# EAGLE board agatbreadboard (EAGLE 7.5.0), part 1 of 5
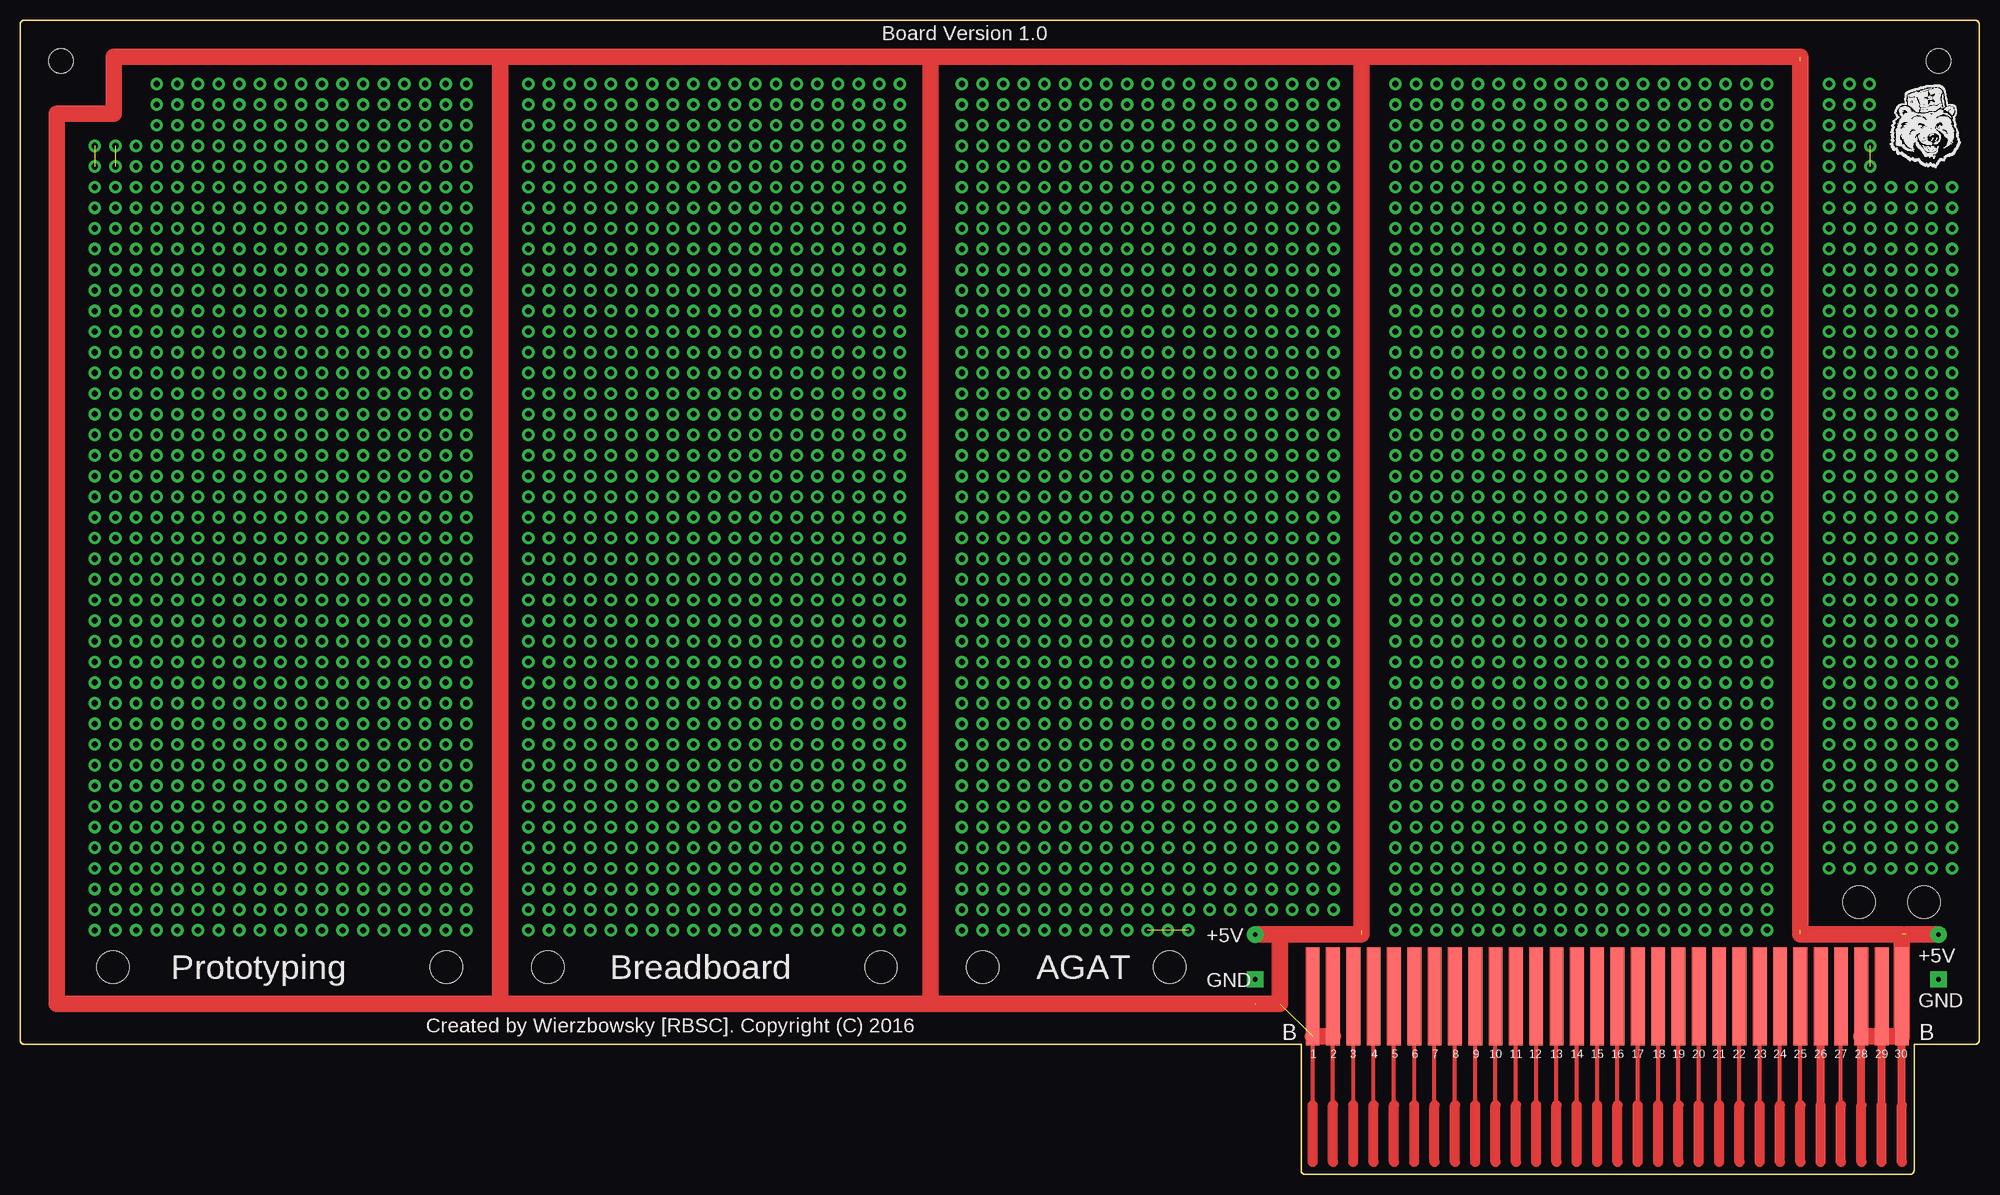
[diagram p0: board, top side]
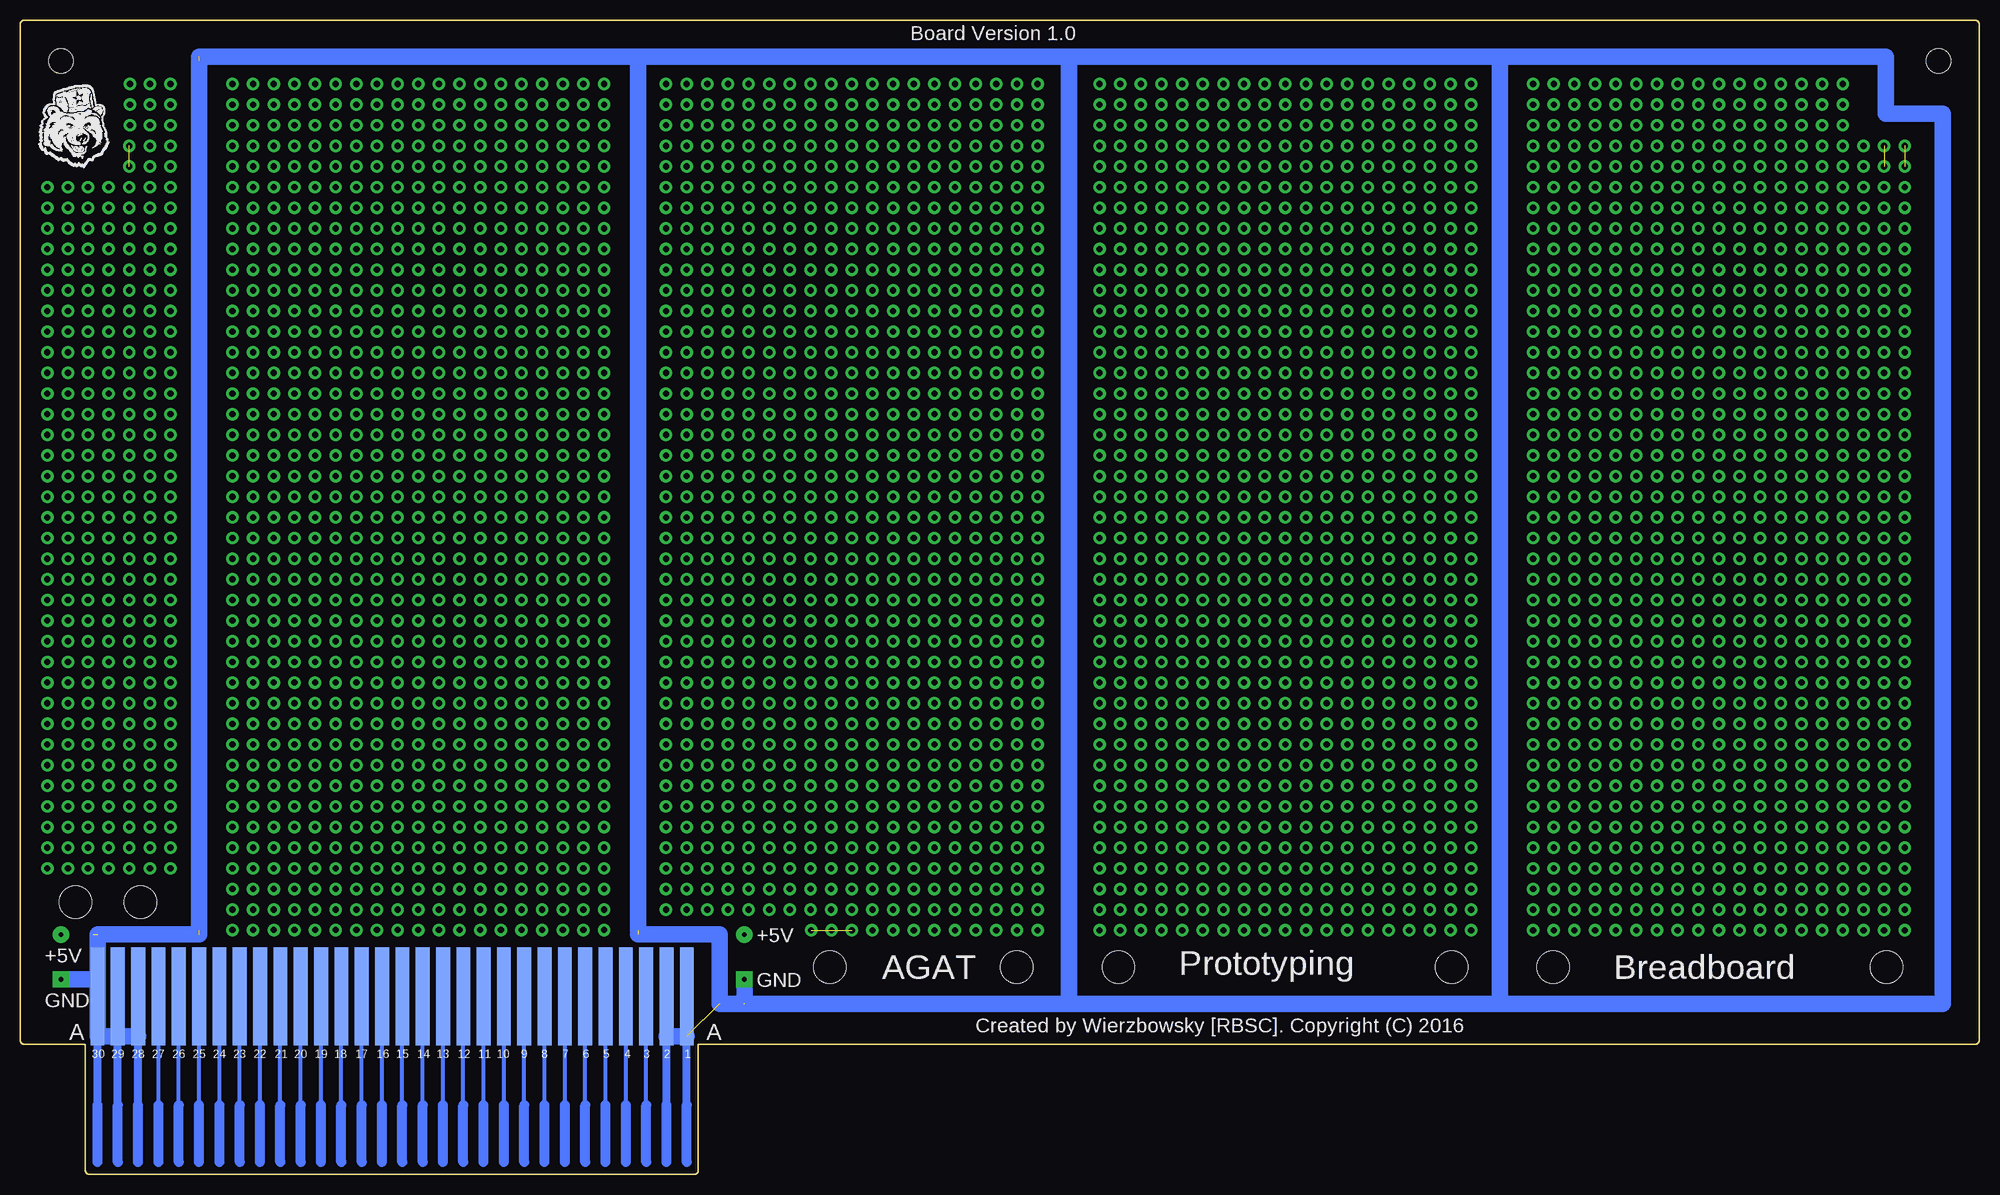
[diagram p1: board, bottom side, seen from below]

Size 241 x 142 mm. Coordinates in mm from the lower left corner, seen from the top.
Outline: 0.5,142 240.5,142 arc-90 241,141.5 241,16.5 arc-90 240.5,16 233,16 233,0.5 arc-90 232.5,0 158,0 arc-90 157.6,0.5 157.6,16 0.5,16 arc-90 0,16.5 0,141.5 arc-90 0.5,142
Copper layers (1*16): Top 0.035mm / dielectric 1.5mm / Bottom 0.035mm
Design rules "default": minimum track width 10mil, minimum drill 24mil, track to track 8mil, track to pad 8mil, pad to pad 8mil, via to via 8mil, smd to smd 8mil, copper to edge 40mil, drill to drill 8mil, minimum pad ring 10mil, minimum via ring 8mil, stop-mask expansion 4mil, vias tented up to drill 0mil, thermal gap 10mil
Holes 3 mm at 5,137 236,137
Holes 4 mm at 11.4,25.5 52.4,25.5 64.9,25.5 105.9,25.5 118.4,25.5 141.4,25.5 234.2,33.5 226.2,33.5

## Footprints (pad centres in the part's own frame; a part is rotated, then mirrored left to right if it is on the bottom)
AGAT_CONP = smd 1.7 x 12 bottom: A1 -75,21.9; A2 -72.5,21.9; A3 -70,21.9; A4 -67.5,21.9; A5 -65,21.9; A6 -62.5,21.9; A7 -60,21.9; A8 -57.5,21.9; A9 -55,21.9; A10 -52.5,21.9; A11 -50,21.9; A12 -47.5,21.9; A13 -45,21.9; A14 -42.5,21.9; A15 -40,21.9; A16 -37.5,21.9; A17 -35,21.9; A18 -32.5,21.9; A19 -30,21.9; A20 -27.5,21.9; A21 -25,21.9; A22 -22.5,21.9; A23 -20,21.9; A24 -17.5,21.9; A25 -15,21.9; A26 -12.5,21.9; A27 -10,21.9; A28 -7.5,21.9; A29 -5,21.9; A30 -2.5,21.9 | smd 1.7 x 12: B1 -75,21.9; B2 -72.5,21.9; B3 -70,21.9; B4 -67.5,21.9; B5 -65,21.9; B6 -62.5,21.9; B7 -60,21.9; B8 -57.5,21.9; B9 -55,21.9; B10 -52.5,21.9; B11 -50,21.9; B12 -47.5,21.9; B13 -45,21.9; B14 -42.5,21.9; B15 -40,21.9; B16 -37.5,21.9; B17 -35,21.9; B18 -32.5,21.9; B19 -30,21.9; B20 -27.5,21.9; B21 -25,21.9; B22 -22.5,21.9; B23 -20,21.9; B24 -17.5,21.9; B25 -15,21.9; B26 -12.5,21.9; B27 -10,21.9; B28 -7.5,21.9; B29 -5,21.9; B30 -2.5,21.9

## Placement (x,y rotation side)
EDG1  [AGAT_CONP]  234,0 0 top

## Library data of the parts
EDG1 = AGAT_Slot_Connector

## Tracks (layer width: path | path; a pad name or v marks a point on that pad's centre or on a via)
+5V  (via drill 0.6 pad 2)  (3 unrouted)
  Top 1: 4.5,106.54 4.5,106.5 | 4.5,71.54 4.5,72
  Top 2: 165,137.5 219,137.5 219,30 | 165,137.5 112,137.5 | 112,137.5 59,137.5 | 59,137.5 11.5,137.5 11.5,130.5 4.5,130.5 4.5,106.5 4.5,72 4.5,21 59,21 | 59,21 112,21 | 112,21 155,21 155,29.5 | 59,137.5 59,21 | 155,29.5 165,29.5 165,137.5 | 219,29.5 231.5,29.5 231.5,17 226.5,17 | 232,29.5 v236,29.5 | 112,137.5 112,21 | v151.92,29.5 155,29.5
  Bottom 2: 161.5,17 159,17
GND  (via drill 0.6 pad 2)  (3 unrouted)
  Bottom 2: 219,137.5 11.5,137.5 11.5,130.5 4.5,130.5 4.5,21 59,21 | 59,21 112,21 | 112,21 151.92,21 v151.92,24 | 59,137 59,21 | 152,21 155,21 155,29.5 165,29.5 | 112,137 112,21 | 165,137.5 165,30 | 219,137 219,29.5 231.5,29.5 231.5,24 | 231.5,24 231.5,17 226.5,17 | v236,24 231.5,24
HOLE1  (via drill 0.76 pad 1.52)
  other vias: 192.04,30.07
HOLE2  (via drill 0.76 pad 1.52)
  other vias: 181.88,30.07
HOLE111  (via drill 0.76 pad 1.52)
  other vias: 32.02,47.81
HOLE112  (via drill 0.76 pad 1.52)
  other vias: 21.86,47.81
HOLE113  (via drill 0.76 pad 1.52)
  other vias: 32.02,50.35
HOLE114  (via drill 0.76 pad 1.52)
  other vias: 21.86,50.35
HOLE115  (via drill 0.76 pad 1.52)
  other vias: 32.02,52.89
HOLE116  (via drill 0.76 pad 1.52)
  other vias: 21.86,52.89
HOLE117  (via drill 0.76 pad 1.52)
  other vias: 32.02,55.43
HOLE118  (via drill 0.76 pad 1.52)
  other vias: 21.86,55.43
HOLE119  (via drill 0.76 pad 1.52)
  other vias: 32.02,57.97
HOLE120  (via drill 0.76 pad 1.52)
  other vias: 21.86,57.97
HOLE121  (via drill 0.76 pad 1.52)
  other vias: 32.02,60.51
HOLE122  (via drill 0.76 pad 1.52)
  other vias: 21.86,60.51
HOLE123  (via drill 0.76 pad 1.52)
  other vias: 32.02,63.05
HOLE124  (via drill 0.76 pad 1.52)
  other vias: 21.86,63.05
HOLE125  (via drill 0.76 pad 1.52)
  other vias: 32.02,65.59
HOLE126  (via drill 0.76 pad 1.52)
  other vias: 21.86,65.59
HOLE127  (via drill 0.76 pad 1.52)
  other vias: 32.02,68.13
HOLE128  (via drill 0.76 pad 1.52)
  other vias: 21.86,68.13
HOLE129  (via drill 0.76 pad 1.52)
  other vias: 32.02,70.67
HOLE130  (via drill 0.76 pad 1.52)
  other vias: 21.86,70.67
HOLE131  (via drill 0.76 pad 1.52)
  other vias: 32.02,73.21
HOLE132  (via drill 0.76 pad 1.52)
  other vias: 21.86,73.21
HOLE133  (via drill 0.76 pad 1.52)
  other vias: 32.02,75.75
HOLE134  (via drill 0.76 pad 1.52)
  other vias: 21.86,75.75
HOLE135  (via drill 0.76 pad 1.52)
  other vias: 32.02,78.29
HOLE136  (via drill 0.76 pad 1.52)
  other vias: 21.86,78.29
HOLE137  (via drill 0.76 pad 1.52)
  other vias: 32.02,80.83
HOLE138  (via drill 0.76 pad 1.52)
  other vias: 21.86,80.83
HOLE139  (via drill 0.76 pad 1.52)
  other vias: 32.02,83.37
HOLE140  (via drill 0.76 pad 1.52)
  other vias: 21.86,83.37
HOLE141  (via drill 0.76 pad 1.52)
  other vias: 32.02,85.91
HOLE142  (via drill 0.76 pad 1.52)
  other vias: 21.86,85.91
HOLE143  (via drill 0.76 pad 1.52)
  other vias: 32.02,88.45
HOLE144  (via drill 0.76 pad 1.52)
  other vias: 21.86,88.45
HOLE145  (via drill 0.76 pad 1.52)
  other vias: 32.02,90.99
HOLE146  (via drill 0.76 pad 1.52)
  other vias: 21.86,90.99
HOLE147  (via drill 0.76 pad 1.52)
  other vias: 32.02,93.53
HOLE148  (via drill 0.76 pad 1.52)
  other vias: 21.86,93.53
HOLE149  (via drill 0.76 pad 1.52)
  other vias: 32.02,96.07
HOLE150  (via drill 0.76 pad 1.52)
  other vias: 21.86,96.07
HOLE151  (via drill 0.76 pad 1.52)
  other vias: 32.02,98.61
HOLE152  (via drill 0.76 pad 1.52)
  other vias: 21.86,98.61
HOLE153  (via drill 0.76 pad 1.52)
  other vias: 32.02,101.15
HOLE154  (via drill 0.76 pad 1.52)
  other vias: 21.86,101.15
HOLE155  (via drill 0.76 pad 1.52)
  other vias: 32.02,103.69
HOLE156  (via drill 0.76 pad 1.52)
  other vias: 21.86,103.69
HOLE157  (via drill 0.76 pad 1.52)
  other vias: 32.02,106.23
HOLE158  (via drill 0.76 pad 1.52)
  other vias: 21.86,106.23
HOLE159  (via drill 0.76 pad 1.52)
  other vias: 32.02,108.77
HOLE160  (via drill 0.76 pad 1.52)
  other vias: 21.86,108.77
HOLE161  (via drill 0.76 pad 1.52)
  other vias: 32.02,111.31
HOLE162  (via drill 0.76 pad 1.52)
  other vias: 21.86,111.31
HOLE163  (via drill 0.76 pad 1.52)
  other vias: 32.02,113.85
HOLE164  (via drill 0.76 pad 1.52)
  other vias: 21.86,113.85
HOLE165  (via drill 0.76 pad 1.52)
  other vias: 32.02,116.39
HOLE166  (via drill 0.76 pad 1.52)
  other vias: 21.86,116.39
HOLE167  (via drill 0.76 pad 1.52)
  other vias: 32.02,118.93
HOLE168  (via drill 0.76 pad 1.52)
  other vias: 21.86,118.93
HOLE169  (via drill 0.76 pad 1.52)
  other vias: 32.02,121.47
HOLE170  (via drill 0.76 pad 1.52)
  other vias: 21.86,121.47
HOLE171  (via drill 0.76 pad 1.52)
  other vias: 32.02,124.01
HOLE172  (via drill 0.76 pad 1.52)
  other vias: 21.86,124.01
HOLE173  (via drill 0.76 pad 1.52)
  other vias: 32.02,126.55
HOLE174  (via drill 0.76 pad 1.52)
  other vias: 21.86,126.55
HOLE175  (via drill 0.76 pad 1.52)
  other vias: 32.02,129.09
HOLE176  (via drill 0.76 pad 1.52)
  other vias: 21.86,129.09
HOLE177  (via drill 0.76 pad 1.52)
  other vias: 32.02,131.63
HOLE178  (via drill 0.76 pad 1.52)
  other vias: 21.86,131.63
HOLE179  (via drill 0.76 pad 1.52)
  other vias: 32.02,134.17
HOLE180  (via drill 0.76 pad 1.52)
  other vias: 21.86,134.17
HOLE181  (via drill 0.76 pad 1.52)
  other vias: 32.02,30.03
HOLE182  (via drill 0.76 pad 1.52)
  other vias: 21.86,30.03
HOLE183  (via drill 0.76 pad 1.52)
  other vias: 32.02,32.57
HOLE184  (via drill 0.76 pad 1.52)
  other vias: 21.86,32.57
HOLE185  (via drill 0.76 pad 1.52)
  other vias: 32.02,35.11
HOLE186  (via drill 0.76 pad 1.52)
  other vias: 21.86,35.11
HOLE187  (via drill 0.76 pad 1.52)
  other vias: 32.02,37.65
HOLE188  (via drill 0.76 pad 1.52)
  other vias: 21.86,37.65
HOLE189  (via drill 0.76 pad 1.52)
  other vias: 32.02,40.19
HOLE190  (via drill 0.76 pad 1.52)
  other vias: 21.86,40.19
HOLE191  (via drill 0.76 pad 1.52)
  other vias: 32.02,42.73
HOLE192  (via drill 0.76 pad 1.52)
  other vias: 21.86,42.73
HOLE193  (via drill 0.76 pad 1.52)
  other vias: 32.02,45.27
HOLE194  (via drill 0.76 pad 1.52)
  other vias: 21.86,45.27
HOLE195  (via drill 0.76 pad 1.52)
  other vias: 85.36,47.81
HOLE196  (via drill 0.76 pad 1.52)
  other vias: 75.2,47.81
HOLE197  (via drill 0.76 pad 1.52)
  other vias: 85.36,50.35
HOLE198  (via drill 0.76 pad 1.52)
  other vias: 75.2,50.35
HOLE199  (via drill 0.76 pad 1.52)
  other vias: 85.36,52.89
HOLE200  (via drill 0.76 pad 1.52)
  other vias: 75.2,52.89
HOLE201  (via drill 0.76 pad 1.52)
  other vias: 85.36,55.43
HOLE202  (via drill 0.76 pad 1.52)
  other vias: 75.2,55.43
HOLE203  (via drill 0.76 pad 1.52)
  other vias: 85.36,57.97
HOLE204  (via drill 0.76 pad 1.52)
  other vias: 75.2,57.97
HOLE205  (via drill 0.76 pad 1.52)
  other vias: 85.36,60.51
HOLE206  (via drill 0.76 pad 1.52)
  other vias: 75.2,60.51
HOLE207  (via drill 0.76 pad 1.52)
  other vias: 85.36,63.05
HOLE208  (via drill 0.76 pad 1.52)
  other vias: 75.2,63.05
HOLE209  (via drill 0.76 pad 1.52)
  other vias: 85.36,65.59
HOLE210  (via drill 0.76 pad 1.52)
  other vias: 75.2,65.59
HOLE211  (via drill 0.76 pad 1.52)
  other vias: 85.36,68.13
HOLE212  (via drill 0.76 pad 1.52)
  other vias: 75.2,68.13
HOLE213  (via drill 0.76 pad 1.52)
  other vias: 85.36,70.67
HOLE214  (via drill 0.76 pad 1.52)
  other vias: 75.2,70.67
HOLE215  (via drill 0.76 pad 1.52)
  other vias: 85.36,73.21
HOLE216  (via drill 0.76 pad 1.52)
  other vias: 75.2,73.21
HOLE217  (via drill 0.76 pad 1.52)
  other vias: 85.36,75.75
HOLE218  (via drill 0.76 pad 1.52)
  other vias: 75.2,75.75
HOLE219  (via drill 0.76 pad 1.52)
  other vias: 85.36,78.29
HOLE220  (via drill 0.76 pad 1.52)
  other vias: 75.2,78.29
HOLE221  (via drill 0.76 pad 1.52)
  other vias: 85.36,80.83
HOLE222  (via drill 0.76 pad 1.52)
  other vias: 75.2,80.83
HOLE223  (via drill 0.76 pad 1.52)
  other vias: 85.36,83.37
HOLE224  (via drill 0.76 pad 1.52)
  other vias: 75.2,83.37
HOLE225  (via drill 0.76 pad 1.52)
  other vias: 85.36,85.91
HOLE226  (via drill 0.76 pad 1.52)
  other vias: 75.2,85.91
HOLE227  (via drill 0.76 pad 1.52)
  other vias: 85.36,88.45
HOLE228  (via drill 0.76 pad 1.52)
  other vias: 75.2,88.45
HOLE229  (via drill 0.76 pad 1.52)
  other vias: 85.36,90.99
HOLE230  (via drill 0.76 pad 1.52)
  other vias: 75.2,90.99
HOLE231  (via drill 0.76 pad 1.52)
  other vias: 85.36,93.53
HOLE232  (via drill 0.76 pad 1.52)
  other vias: 75.2,93.53
HOLE233  (via drill 0.76 pad 1.52)
  other vias: 85.36,96.07
HOLE234  (via drill 0.76 pad 1.52)
  other vias: 75.2,96.07
HOLE235  (via drill 0.76 pad 1.52)
  other vias: 85.36,98.61
HOLE236  (via drill 0.76 pad 1.52)
  other vias: 75.2,98.61
HOLE237  (via drill 0.76 pad 1.52)
  other vias: 85.36,101.15
HOLE238  (via drill 0.76 pad 1.52)
  other vias: 75.2,101.15
HOLE239  (via drill 0.76 pad 1.52)
  other vias: 85.36,103.69
HOLE240  (via drill 0.76 pad 1.52)
  other vias: 75.2,103.69
HOLE241  (via drill 0.76 pad 1.52)
  other vias: 85.36,106.23
HOLE242  (via drill 0.76 pad 1.52)
  other vias: 75.2,106.23
HOLE243  (via drill 0.76 pad 1.52)
  other vias: 85.36,108.77
HOLE244  (via drill 0.76 pad 1.52)
  other vias: 75.2,108.77
HOLE245  (via drill 0.76 pad 1.52)
  other vias: 85.36,111.31
HOLE246  (via drill 0.76 pad 1.52)
  other vias: 75.2,111.31
HOLE247  (via drill 0.76 pad 1.52)
  other vias: 85.36,113.85
HOLE248  (via drill 0.76 pad 1.52)
  other vias: 75.2,113.85
HOLE249  (via drill 0.76 pad 1.52)
  other vias: 85.36,116.39
HOLE250  (via drill 0.76 pad 1.52)
  other vias: 75.2,116.39
HOLE251  (via drill 0.76 pad 1.52)
  other vias: 85.36,118.93
HOLE252  (via drill 0.76 pad 1.52)
  other vias: 75.2,118.93
HOLE253  (via drill 0.76 pad 1.52)
  other vias: 85.36,121.47
HOLE254  (via drill 0.76 pad 1.52)
  other vias: 75.2,121.47
HOLE255  (via drill 0.76 pad 1.52)
  other vias: 85.36,124.01
HOLE256  (via drill 0.76 pad 1.52)
  other vias: 75.2,124.01
HOLE257  (via drill 0.76 pad 1.52)
  other vias: 85.36,126.55
HOLE258  (via drill 0.76 pad 1.52)
  other vias: 75.2,126.55
HOLE259  (via drill 0.76 pad 1.52)
  other vias: 85.36,129.09
HOLE260  (via drill 0.76 pad 1.52)
  other vias: 75.2,129.09
HOLE261  (via drill 0.76 pad 1.52)
  other vias: 85.36,131.63
HOLE262  (via drill 0.76 pad 1.52)
  other vias: 75.2,131.63
HOLE263  (via drill 0.76 pad 1.52)
  other vias: 85.36,134.17
HOLE264  (via drill 0.76 pad 1.52)
  other vias: 75.2,134.17
HOLE265  (via drill 0.76 pad 1.52)
  other vias: 85.36,30.03
HOLE266  (via drill 0.76 pad 1.52)
  other vias: 75.2,30.03
HOLE267  (via drill 0.76 pad 1.52)
  other vias: 85.36,32.57
HOLE268  (via drill 0.76 pad 1.52)
  other vias: 75.2,32.57
HOLE269  (via drill 0.76 pad 1.52)
  other vias: 85.36,35.11
HOLE270  (via drill 0.76 pad 1.52)
  other vias: 75.2,35.11
HOLE271  (via drill 0.76 pad 1.52)
  other vias: 85.36,37.65
HOLE272  (via drill 0.76 pad 1.52)
  other vias: 75.2,37.65
HOLE273  (via drill 0.76 pad 1.52)
  other vias: 85.36,40.19
HOLE274  (via drill 0.76 pad 1.52)
  other vias: 75.2,40.19
HOLE275  (via drill 0.76 pad 1.52)
  other vias: 85.36,42.73
HOLE276  (via drill 0.76 pad 1.52)
  other vias: 75.2,42.73
HOLE277  (via drill 0.76 pad 1.52)
  other vias: 85.36,45.27
HOLE278  (via drill 0.76 pad 1.52)
  other vias: 75.2,45.27
HOLE279  (via drill 0.76 pad 1.52)
  other vias: 138.7,47.81
HOLE280  (via drill 0.76 pad 1.52)
  other vias: 128.54,47.81
HOLE281  (via drill 0.76 pad 1.52)
  other vias: 138.7,50.35
HOLE282  (via drill 0.76 pad 1.52)
  other vias: 128.54,50.35
HOLE283  (via drill 0.76 pad 1.52)
  other vias: 138.7,52.89
HOLE284  (via drill 0.76 pad 1.52)
  other vias: 128.54,52.89
HOLE285  (via drill 0.76 pad 1.52)
  other vias: 138.7,55.43
HOLE286  (via drill 0.76 pad 1.52)
  other vias: 128.54,55.43
HOLE287  (via drill 0.76 pad 1.52)
  other vias: 138.7,57.97
HOLE288  (via drill 0.76 pad 1.52)
  other vias: 128.54,57.97
HOLE289  (via drill 0.76 pad 1.52)
  other vias: 138.7,60.51
HOLE290  (via drill 0.76 pad 1.52)
  other vias: 128.54,60.51
HOLE291  (via drill 0.76 pad 1.52)
  other vias: 138.7,63.05
HOLE292  (via drill 0.76 pad 1.52)
  other vias: 128.54,63.05
HOLE293  (via drill 0.76 pad 1.52)
  other vias: 138.7,65.59
HOLE294  (via drill 0.76 pad 1.52)
  other vias: 128.54,65.59
HOLE295  (via drill 0.76 pad 1.52)
  other vias: 138.7,68.13
HOLE296  (via drill 0.76 pad 1.52)
  other vias: 128.54,68.13
HOLE297  (via drill 0.76 pad 1.52)
  other vias: 138.7,70.67
HOLE298  (via drill 0.76 pad 1.52)
  other vias: 128.54,70.67
HOLE299  (via drill 0.76 pad 1.52)
  other vias: 138.7,73.21
HOLE300  (via drill 0.76 pad 1.52)
  other vias: 128.54,73.21
HOLE301  (via drill 0.76 pad 1.52)
  other vias: 138.7,75.75
HOLE302  (via drill 0.76 pad 1.52)
  other vias: 128.54,75.75
HOLE303  (via drill 0.76 pad 1.52)
  other vias: 138.7,78.29
HOLE304  (via drill 0.76 pad 1.52)
  other vias: 128.54,78.29
HOLE305  (via drill 0.76 pad 1.52)
  other vias: 138.7,80.83
HOLE306  (via drill 0.76 pad 1.52)
  other vias: 128.54,80.83
HOLE307  (via drill 0.76 pad 1.52)
  other vias: 138.7,83.37
HOLE308  (via drill 0.76 pad 1.52)
  other vias: 128.54,83.37
HOLE309  (via drill 0.76 pad 1.52)
  other vias: 138.7,85.91
HOLE310  (via drill 0.76 pad 1.52)
  other vias: 128.54,85.91
HOLE311  (via drill 0.76 pad 1.52)
  other vias: 138.7,88.45
HOLE312  (via drill 0.76 pad 1.52)
  other vias: 128.54,88.45
HOLE313  (via drill 0.76 pad 1.52)
  other vias: 138.7,90.99
HOLE314  (via drill 0.76 pad 1.52)
  other vias: 128.54,90.99
HOLE315  (via drill 0.76 pad 1.52)
  other vias: 138.7,93.53
HOLE316  (via drill 0.76 pad 1.52)
  other vias: 128.54,93.53
HOLE317  (via drill 0.76 pad 1.52)
  other vias: 138.7,96.07
HOLE318  (via drill 0.76 pad 1.52)
  other vias: 128.54,96.07
HOLE319  (via drill 0.76 pad 1.52)
  other vias: 138.7,98.61
HOLE320  (via drill 0.76 pad 1.52)
  other vias: 128.54,98.61
HOLE321  (via drill 0.76 pad 1.52)
  other vias: 138.7,101.15
HOLE322  (via drill 0.76 pad 1.52)
  other vias: 128.54,101.15
HOLE323  (via drill 0.76 pad 1.52)
  other vias: 138.7,103.69
HOLE324  (via drill 0.76 pad 1.52)
  other vias: 128.54,103.69
HOLE325  (via drill 0.76 pad 1.52)
  other vias: 138.7,106.23
HOLE326  (via drill 0.76 pad 1.52)
  other vias: 128.54,106.23
HOLE327  (via drill 0.76 pad 1.52)
  other vias: 138.7,108.77
HOLE328  (via drill 0.76 pad 1.52)
  other vias: 128.54,108.77
HOLE329  (via drill 0.76 pad 1.52)
  other vias: 138.7,111.31
HOLE330  (via drill 0.76 pad 1.52)
  other vias: 128.54,111.31
HOLE331  (via drill 0.76 pad 1.52)
  other vias: 138.7,113.85
HOLE332  (via drill 0.76 pad 1.52)
  other vias: 128.54,113.85
HOLE333  (via drill 0.76 pad 1.52)
  other vias: 138.7,116.39
HOLE334  (via drill 0.76 pad 1.52)
  other vias: 128.54,116.39
HOLE335  (via drill 0.76 pad 1.52)
  other vias: 138.7,118.93
HOLE336  (via drill 0.76 pad 1.52)
  other vias: 128.54,118.93
HOLE337  (via drill 0.76 pad 1.52)
  other vias: 138.7,121.47
HOLE338  (via drill 0.76 pad 1.52)
  other vias: 128.54,121.47
HOLE339  (via drill 0.76 pad 1.52)
  other vias: 138.7,124.01
HOLE340  (via drill 0.76 pad 1.52)
  other vias: 128.54,124.01
HOLE341  (via drill 0.76 pad 1.52)
  other vias: 138.7,126.55
HOLE342  (via drill 0.76 pad 1.52)
  other vias: 128.54,126.55
HOLE343  (via drill 0.76 pad 1.52)
  other vias: 138.7,129.09
HOLE344  (via drill 0.76 pad 1.52)
  other vias: 128.54,129.09
HOLE345  (via drill 0.76 pad 1.52)
  other vias: 138.7,131.63
HOLE346  (via drill 0.76 pad 1.52)
  other vias: 128.54,131.63
HOLE347  (via drill 0.76 pad 1.52)
  other vias: 138.7,134.17
HOLE348  (via drill 0.76 pad 1.52)
  other vias: 128.54,134.17
HOLE349  (via drill 0.76 pad 1.52)  (2 unrouted)
  other vias: 138.7,30.03 141.2,30.03 143.7,30.03
HOLE350  (via drill 0.76 pad 1.52)
  other vias: 128.54,30.03
HOLE351  (via drill 0.76 pad 1.52)
  other vias: 138.7,32.57
HOLE352  (via drill 0.76 pad 1.52)
  other vias: 128.54,32.57
HOLE353  (via drill 0.76 pad 1.52)
  other vias: 138.7,35.11
HOLE354  (via drill 0.76 pad 1.52)
  other vias: 128.54,35.11
HOLE355  (via drill 0.76 pad 1.52)
  other vias: 138.7,37.65
HOLE356  (via drill 0.76 pad 1.52)
  other vias: 128.54,37.65
HOLE357  (via drill 0.76 pad 1.52)
  other vias: 138.7,40.19
HOLE358  (via drill 0.76 pad 1.52)
  other vias: 128.54,40.19
HOLE359  (via drill 0.76 pad 1.52)
  other vias: 138.7,42.73
HOLE360  (via drill 0.76 pad 1.52)
  other vias: 128.54,42.73
HOLE361  (via drill 0.76 pad 1.52)
  other vias: 138.7,45.27
HOLE362  (via drill 0.76 pad 1.52)
  other vias: 128.54,45.27
HOLE363  (via drill 0.76 pad 1.52)
  other vias: 192.04,47.81
HOLE364  (via drill 0.76 pad 1.52)
  other vias: 181.88,47.81
HOLE365  (via drill 0.76 pad 1.52)
  other vias: 192.04,50.35
HOLE366  (via drill 0.76 pad 1.52)
  other vias: 181.88,50.35
HOLE367  (via drill 0.76 pad 1.52)
  other vias: 192.04,52.89
HOLE368  (via drill 0.76 pad 1.52)
  other vias: 181.88,52.89
HOLE369  (via drill 0.76 pad 1.52)
  other vias: 192.04,55.43
HOLE370  (via drill 0.76 pad 1.52)
  other vias: 181.88,55.43
HOLE371  (via drill 0.76 pad 1.52)
  other vias: 192.04,57.97
HOLE372  (via drill 0.76 pad 1.52)
  other vias: 181.88,57.97
HOLE373  (via drill 0.76 pad 1.52)
  other vias: 192.04,60.51
HOLE374  (via drill 0.76 pad 1.52)
  other vias: 181.88,60.51
HOLE375  (via drill 0.76 pad 1.52)
  other vias: 192.04,63.05
HOLE376  (via drill 0.76 pad 1.52)
  other vias: 181.88,63.05
HOLE377  (via drill 0.76 pad 1.52)
  other vias: 192.04,65.59
HOLE378  (via drill 0.76 pad 1.52)
  other vias: 181.88,65.59
HOLE379  (via drill 0.76 pad 1.52)
  other vias: 192.04,68.13
HOLE380  (via drill 0.76 pad 1.52)
  other vias: 181.88,68.13
HOLE381  (via drill 0.76 pad 1.52)
  other vias: 192.04,70.67
HOLE382  (via drill 0.76 pad 1.52)
  other vias: 181.88,70.67
HOLE383  (via drill 0.76 pad 1.52)
  other vias: 192.04,73.21
HOLE384  (via drill 0.76 pad 1.52)
  other vias: 181.88,73.21
HOLE385  (via drill 0.76 pad 1.52)
  other vias: 192.04,75.75
HOLE386  (via drill 0.76 pad 1.52)
  other vias: 181.88,75.75
HOLE387  (via drill 0.76 pad 1.52)
  other vias: 192.04,78.29
HOLE388  (via drill 0.76 pad 1.52)
  other vias: 181.88,78.29
HOLE389  (via drill 0.76 pad 1.52)
  other vias: 192.04,80.83
HOLE390  (via drill 0.76 pad 1.52)
  other vias: 181.88,80.83
HOLE391  (via drill 0.76 pad 1.52)
  other vias: 192.04,83.37
HOLE392  (via drill 0.76 pad 1.52)
  other vias: 181.88,83.37
HOLE393  (via drill 0.76 pad 1.52)
  other vias: 192.04,85.91
HOLE394  (via drill 0.76 pad 1.52)
  other vias: 181.88,85.91
HOLE395  (via drill 0.76 pad 1.52)
  other vias: 192.04,88.45
HOLE396  (via drill 0.76 pad 1.52)
  other vias: 181.88,88.45
HOLE397  (via drill 0.76 pad 1.52)
  other vias: 192.04,90.99
HOLE398  (via drill 0.76 pad 1.52)
  other vias: 181.88,90.99
HOLE399  (via drill 0.76 pad 1.52)
  other vias: 192.04,93.53
HOLE400  (via drill 0.76 pad 1.52)
  other vias: 181.88,93.53
HOLE401  (via drill 0.76 pad 1.52)
  other vias: 192.04,96.07
HOLE402  (via drill 0.76 pad 1.52)
  other vias: 181.88,96.07
HOLE403  (via drill 0.76 pad 1.52)
  other vias: 192.04,98.61
HOLE404  (via drill 0.76 pad 1.52)
  other vias: 181.88,98.61
HOLE405  (via drill 0.76 pad 1.52)
  other vias: 192.04,101.15
HOLE406  (via drill 0.76 pad 1.52)
  other vias: 181.88,101.15
HOLE407  (via drill 0.76 pad 1.52)
  other vias: 192.04,103.69
HOLE408  (via drill 0.76 pad 1.52)
  other vias: 181.88,103.69
HOLE409  (via drill 0.76 pad 1.52)
  other vias: 192.04,106.23
HOLE410  (via drill 0.76 pad 1.52)
  other vias: 181.88,106.23
HOLE411  (via drill 0.76 pad 1.52)
  other vias: 192.04,108.77
HOLE412  (via drill 0.76 pad 1.52)
  other vias: 181.88,108.77
HOLE413  (via drill 0.76 pad 1.52)
  other vias: 192.04,111.31
HOLE414  (via drill 0.76 pad 1.52)
  other vias: 181.88,111.31
HOLE415  (via drill 0.76 pad 1.52)
  other vias: 192.04,113.85
HOLE416  (via drill 0.76 pad 1.52)
  other vias: 181.88,113.85
HOLE417  (via drill 0.76 pad 1.52)
  other vias: 192.04,116.39
HOLE418  (via drill 0.76 pad 1.52)
  other vias: 181.88,116.39
HOLE419  (via drill 0.76 pad 1.52)
  other vias: 192.04,118.93
HOLE420  (via drill 0.76 pad 1.52)
  other vias: 181.88,118.93
HOLE421  (via drill 0.76 pad 1.52)
  other vias: 192.04,121.47
HOLE422  (via drill 0.76 pad 1.52)
  other vias: 181.88,121.47
HOLE423  (via drill 0.76 pad 1.52)
  other vias: 192.04,124.01
HOLE424  (via drill 0.76 pad 1.52)
  other vias: 181.88,124.01
HOLE425  (via drill 0.76 pad 1.52)
  other vias: 192.04,126.55
HOLE426  (via drill 0.76 pad 1.52)
  other vias: 181.88,126.55
HOLE427  (via drill 0.76 pad 1.52)
  other vias: 192.04,129.09
HOLE428  (via drill 0.76 pad 1.52)
  other vias: 181.88,129.09
HOLE429  (via drill 0.76 pad 1.52)
  other vias: 192.04,131.63
HOLE430  (via drill 0.76 pad 1.52)
  other vias: 181.88,131.63
HOLE431  (via drill 0.76 pad 1.52)
  other vias: 192.04,134.17
HOLE432  (via drill 0.76 pad 1.52)
  other vias: 181.88,134.17
HOLE435  (via drill 0.76 pad 1.52)
  other vias: 192.04,32.57
HOLE436  (via drill 0.76 pad 1.52)
  other vias: 181.88,32.57
HOLE437  (via drill 0.76 pad 1.52)
  other vias: 192.04,35.11
HOLE438  (via drill 0.76 pad 1.52)
  other vias: 181.88,35.11
HOLE439  (via drill 0.76 pad 1.52)
  other vias: 192.04,37.65
HOLE440  (via drill 0.76 pad 1.52)
  other vias: 181.88,37.65
HOLE441  (via drill 0.76 pad 1.52)
  other vias: 192.04,40.19
HOLE442  (via drill 0.76 pad 1.52)
  other vias: 181.88,40.19
HOLE443  (via drill 0.76 pad 1.52)
  other vias: 192.04,42.73
HOLE444  (via drill 0.76 pad 1.52)
  other vias: 181.88,42.73
HOLE445  (via drill 0.76 pad 1.52)
  other vias: 192.04,45.27
HOLE446  (via drill 0.76 pad 1.52)
  other vias: 181.88,45.27
N$1  (via drill 0.76 pad 1.52)
  other vias: 197.12,30.07
N$2  (via drill 0.76 pad 1.52)
  other vias: 194.58,30.07
N$3  (via drill 0.76 pad 1.52)
  other vias: 202.2,30.07
N$4  (via drill 0.76 pad 1.52)
  other vias: 199.66,30.07
N$5  (via drill 0.76 pad 1.52)
  other vias: 207.28,30.07
N$6  (via drill 0.76 pad 1.52)
  other vias: 204.74,30.07
N$7  (via drill 0.76 pad 1.52)
  other vias: 212.36,30.07
N$8  (via drill 0.76 pad 1.52)
  other vias: 209.82,30.07
N$9  (via drill 0.76 pad 1.52)
  other vias: 214.9,30.07
N$10  (via drill 0.76 pad 1.52)
  other vias: 237.68,47.81
N$11  (via drill 0.76 pad 1.52)
  other vias: 235.14,47.81
N$12  (via drill 0.76 pad 1.52)
  other vias: 237.68,50.35
N$13  (via drill 0.76 pad 1.52)
  other vias: 235.14,50.35
N$14  (via drill 0.76 pad 1.52)
  other vias: 237.68,52.89
N$15  (via drill 0.76 pad 1.52)
  other vias: 235.14,52.89
N$16  (via drill 0.76 pad 1.52)
  other vias: 237.68,55.43
N$17  (via drill 0.76 pad 1.52)
  other vias: 235.14,55.43
N$18  (via drill 0.76 pad 1.52)
  other vias: 237.68,57.97
N$19  (via drill 0.76 pad 1.52)
  other vias: 235.14,57.97
N$20  (via drill 0.76 pad 1.52)
  other vias: 237.68,60.51
N$21  (via drill 0.76 pad 1.52)
  other vias: 235.14,60.51
N$22  (via drill 0.76 pad 1.52)
  other vias: 237.68,63.05
N$23  (via drill 0.76 pad 1.52)
  other vias: 235.14,63.05
N$24  (via drill 0.76 pad 1.52)
  other vias: 237.68,65.59
N$25  (via drill 0.76 pad 1.52)
  other vias: 235.14,65.59
N$26  (via drill 0.76 pad 1.52)
  other vias: 237.68,68.13
N$27  (via drill 0.76 pad 1.52)
  other vias: 235.14,68.13
N$28  (via drill 0.76 pad 1.52)
  other vias: 237.68,70.67
N$29  (via drill 0.76 pad 1.52)
  other vias: 235.14,70.67
N$30  (via drill 0.76 pad 1.52)
  other vias: 237.68,73.21
N$31  (via drill 0.76 pad 1.52)
  other vias: 235.14,73.21
N$32  (via drill 0.76 pad 1.52)
  other vias: 237.68,75.75
N$33  (via drill 0.76 pad 1.52)
  other vias: 235.14,75.75
N$34  (via drill 0.76 pad 1.52)
  other vias: 237.68,78.29
N$35  (via drill 0.76 pad 1.52)
  other vias: 235.14,78.29
N$36  (via drill 0.76 pad 1.52)
  other vias: 237.68,80.83
N$37  (via drill 0.76 pad 1.52)
  other vias: 235.14,80.83
N$38  (via drill 0.76 pad 1.52)
  other vias: 237.68,83.37
N$39  (via drill 0.76 pad 1.52)
  other vias: 235.14,83.37
N$40  (via drill 0.76 pad 1.52)
  other vias: 237.68,85.91
N$41  (via drill 0.76 pad 1.52)
  other vias: 235.14,85.91
N$42  (via drill 0.76 pad 1.52)
  other vias: 237.68,88.45
N$43  (via drill 0.76 pad 1.52)
  other vias: 235.14,88.45
N$44  (via drill 0.76 pad 1.52)
  other vias: 237.68,90.99
N$45  (via drill 0.76 pad 1.52)
  other vias: 235.14,90.99
N$46  (via drill 0.76 pad 1.52)
  other vias: 237.68,93.53
N$47  (via drill 0.76 pad 1.52)
  other vias: 235.14,93.53
N$48  (via drill 0.76 pad 1.52)
  other vias: 237.68,96.07
N$49  (via drill 0.76 pad 1.52)
  other vias: 235.14,96.07
N$50  (via drill 0.76 pad 1.52)
  other vias: 237.68,98.61
N$51  (via drill 0.76 pad 1.52)
  other vias: 235.14,98.61
N$52  (via drill 0.76 pad 1.52)
  other vias: 237.68,101.15
N$53  (via drill 0.76 pad 1.52)
  other vias: 235.14,101.15
N$54  (via drill 0.76 pad 1.52)
  other vias: 237.68,103.69
N$55  (via drill 0.76 pad 1.52)
  other vias: 235.14,103.69
N$56  (via drill 0.76 pad 1.52)
  other vias: 237.68,106.23
N$57  (via drill 0.76 pad 1.52)
  other vias: 235.14,106.23
N$58  (via drill 0.76 pad 1.52)
  other vias: 237.68,108.77
N$59  (via drill 0.76 pad 1.52)
  other vias: 235.14,108.77
N$60  (via drill 0.76 pad 1.52)
  other vias: 237.68,111.31
N$61  (via drill 0.76 pad 1.52)
  other vias: 235.14,111.31
N$62  (via drill 0.76 pad 1.52)
  other vias: 237.68,113.85
N$63  (via drill 0.76 pad 1.52)
  other vias: 235.14,113.85
N$64  (via drill 0.76 pad 1.52)
  other vias: 237.68,116.39
N$65  (via drill 0.76 pad 1.52)
  other vias: 235.14,116.39
N$66  (via drill 0.76 pad 1.52)
  other vias: 237.68,118.93
N$67  (via drill 0.76 pad 1.52)
  other vias: 235.14,118.93
N$68  (via drill 0.76 pad 1.52)
  other vias: 237.68,121.47
N$69  (via drill 0.76 pad 1.52)
  other vias: 235.14,121.47
N$70  (via drill 0.76 pad 1.52)
  other vias: 184.42,30.07
N$71  (via drill 0.76 pad 1.52)
  other vias: 186.96,30.07
N$72  (via drill 0.76 pad 1.52)
  other vias: 189.5,30.07
N$73  (via drill 0.76 pad 1.52)
  other vias: 169.18,30.07
N$74  (via drill 0.76 pad 1.52)
  other vias: 171.72,30.07
N$75  (via drill 0.76 pad 1.52)
  other vias: 174.26,30.07
N$76  (via drill 0.76 pad 1.52)
  other vias: 237.68,37.65
N$77  (via drill 0.76 pad 1.52)
  other vias: 235.14,37.65
N$78  (via drill 0.76 pad 1.52)
  other vias: 237.68,40.19
N$79  (via drill 0.76 pad 1.52)
  other vias: 235.14,40.19
N$80  (via drill 0.76 pad 1.52)
  other vias: 237.68,42.73
N$81  (via drill 0.76 pad 1.52)
  other vias: 235.14,42.73
N$82  (via drill 0.76 pad 1.52)
  other vias: 237.68,45.27
N$83  (via drill 0.76 pad 1.52)
  other vias: 235.14,45.27
N$84  (via drill 0.76 pad 1.52)
  other vias: 227.52,129.09
N$85  (via drill 0.76 pad 1.52)
  other vias: 176.8,30.07
N$86  (via drill 0.76 pad 1.52)
  other vias: 227.52,131.63
N$87  (via drill 0.76 pad 1.52)
  other vias: 179.34,30.07
N$88  (via drill 0.76 pad 1.52)
  other vias: 227.52,134.17
N$89
  Top 2: 161.5,17 159,17
N$1817  (via drill 0.76 pad 1.52)
  other vias: 37.1,47.81
N$1818  (via drill 0.76 pad 1.52)
  other vias: 34.56,47.81
N$1819  (via drill 0.76 pad 1.52)
  other vias: 42.18,47.81
N$1820  (via drill 0.76 pad 1.52)
  other vias: 39.64,47.81
N$1821  (via drill 0.76 pad 1.52)
  other vias: 47.26,47.81
N$1822  (via drill 0.76 pad 1.52)
  other vias: 44.72,47.81
N$1823  (via drill 0.76 pad 1.52)
  other vias: 52.34,47.81
N$1824  (via drill 0.76 pad 1.52)
  other vias: 49.8,47.81
N$1825  (via drill 0.76 pad 1.52)
  other vias: 54.88,47.81
N$1826  (via drill 0.76 pad 1.52)
  other vias: 24.4,47.81
N$1827  (via drill 0.76 pad 1.52)
  other vias: 26.94,47.81
N$1828  (via drill 0.76 pad 1.52)
  other vias: 29.48,47.81
N$1829  (via drill 0.76 pad 1.52)
  other vias: 9.16,47.81
N$1830  (via drill 0.76 pad 1.52)
  other vias: 11.7,47.81
N$1831  (via drill 0.76 pad 1.52)
  other vias: 14.24,47.81
N$1832  (via drill 0.76 pad 1.52)
  other vias: 16.78,47.81
N$1833  (via drill 0.76 pad 1.52)
  other vias: 19.32,47.81
N$1834  (via drill 0.76 pad 1.52)
  other vias: 37.1,50.35
N$1835  (via drill 0.76 pad 1.52)
  other vias: 34.56,50.35
N$1836  (via drill 0.76 pad 1.52)
  other vias: 42.18,50.35
N$1837  (via drill 0.76 pad 1.52)
  other vias: 39.64,50.35
N$1838  (via drill 0.76 pad 1.52)
  other vias: 47.26,50.35
N$1839  (via drill 0.76 pad 1.52)
  other vias: 44.72,50.35
N$1840  (via drill 0.76 pad 1.52)
  other vias: 52.34,50.35
N$1841  (via drill 0.76 pad 1.52)
  other vias: 49.8,50.35
N$1842  (via drill 0.76 pad 1.52)
  other vias: 54.88,50.35
N$1843  (via drill 0.76 pad 1.52)
  other vias: 24.4,50.35
N$1844  (via drill 0.76 pad 1.52)
  other vias: 26.94,50.35
N$1845  (via drill 0.76 pad 1.52)
  other vias: 29.48,50.35
N$1846  (via drill 0.76 pad 1.52)
  other vias: 9.16,50.35
N$1847  (via drill 0.76 pad 1.52)
  other vias: 11.7,50.35
N$1848  (via drill 0.76 pad 1.52)
  other vias: 14.24,50.35
N$1849  (via drill 0.76 pad 1.52)
  other vias: 16.78,50.35
N$1850  (via drill 0.76 pad 1.52)
  other vias: 19.32,50.35
N$1851  (via drill 0.76 pad 1.52)
  other vias: 37.1,52.89
N$1852  (via drill 0.76 pad 1.52)
  other vias: 34.56,52.89
N$1853  (via drill 0.76 pad 1.52)
  other vias: 42.18,52.89
N$1854  (via drill 0.76 pad 1.52)
  other vias: 39.64,52.89
N$1855  (via drill 0.76 pad 1.52)
  other vias: 47.26,52.89
N$1856  (via drill 0.76 pad 1.52)
  other vias: 44.72,52.89
N$1857  (via drill 0.76 pad 1.52)
  other vias: 52.34,52.89
N$1858  (via drill 0.76 pad 1.52)
  other vias: 49.8,52.89
N$1859  (via drill 0.76 pad 1.52)
  other vias: 54.88,52.89
N$1860  (via drill 0.76 pad 1.52)
  other vias: 24.4,52.89
N$1861  (via drill 0.76 pad 1.52)
  other vias: 26.94,52.89
N$1862  (via drill 0.76 pad 1.52)
  other vias: 29.48,52.89
N$1863  (via drill 0.76 pad 1.52)
  other vias: 9.16,52.89
N$1864  (via drill 0.76 pad 1.52)
  other vias: 11.7,52.89
N$1865  (via drill 0.76 pad 1.52)
  other vias: 14.24,52.89
N$1866  (via drill 0.76 pad 1.52)
  other vias: 16.78,52.89
N$1867  (via drill 0.76 pad 1.52)
  other vias: 19.32,52.89
N$1868  (via drill 0.76 pad 1.52)
  other vias: 37.1,55.43
N$1869  (via drill 0.76 pad 1.52)
  other vias: 34.56,55.43
N$1870  (via drill 0.76 pad 1.52)
  other vias: 42.18,55.43
N$1871  (via drill 0.76 pad 1.52)
  other vias: 39.64,55.43
N$1872  (via drill 0.76 pad 1.52)
  other vias: 47.26,55.43
N$1873  (via drill 0.76 pad 1.52)
  other vias: 44.72,55.43
N$1874  (via drill 0.76 pad 1.52)
  other vias: 52.34,55.43
N$1875  (via drill 0.76 pad 1.52)
  other vias: 49.8,55.43
N$1876  (via drill 0.76 pad 1.52)
  other vias: 54.88,55.43
N$1877  (via drill 0.76 pad 1.52)
  other vias: 24.4,55.43
N$1878  (via drill 0.76 pad 1.52)
  other vias: 26.94,55.43
N$1879  (via drill 0.76 pad 1.52)
  other vias: 29.48,55.43
N$1880  (via drill 0.76 pad 1.52)
  other vias: 9.16,55.43
N$1881  (via drill 0.76 pad 1.52)
  other vias: 11.7,55.43
N$1882  (via drill 0.76 pad 1.52)
  other vias: 14.24,55.43
N$1883  (via drill 0.76 pad 1.52)
  other vias: 16.78,55.43
N$1884  (via drill 0.76 pad 1.52)
  other vias: 19.32,55.43
N$1885  (via drill 0.76 pad 1.52)
  other vias: 37.1,57.97
N$1886  (via drill 0.76 pad 1.52)
  other vias: 34.56,57.97
N$1887  (via drill 0.76 pad 1.52)
  other vias: 42.18,57.97
N$1888  (via drill 0.76 pad 1.52)
  other vias: 39.64,57.97
N$1889  (via drill 0.76 pad 1.52)
  other vias: 47.26,57.97
N$1890  (via drill 0.76 pad 1.52)
  other vias: 44.72,57.97
N$1891  (via drill 0.76 pad 1.52)
  other vias: 52.34,57.97
N$1892  (via drill 0.76 pad 1.52)
  other vias: 49.8,57.97
N$1893  (via drill 0.76 pad 1.52)
  other vias: 54.88,57.97
N$1894  (via drill 0.76 pad 1.52)
  other vias: 24.4,57.97
N$1895  (via drill 0.76 pad 1.52)
  other vias: 26.94,57.97
N$1896  (via drill 0.76 pad 1.52)
  other vias: 29.48,57.97
N$1897  (via drill 0.76 pad 1.52)
  other vias: 9.16,57.97
N$1898  (via drill 0.76 pad 1.52)
  other vias: 11.7,57.97
N$1899  (via drill 0.76 pad 1.52)
  other vias: 14.24,57.97
N$1900  (via drill 0.76 pad 1.52)
  other vias: 16.78,57.97
N$1901  (via drill 0.76 pad 1.52)
  other vias: 19.32,57.97
N$1902  (via drill 0.76 pad 1.52)
  other vias: 37.1,60.51
N$1903  (via drill 0.76 pad 1.52)
  other vias: 34.56,60.51
N$1904  (via drill 0.76 pad 1.52)
  other vias: 42.18,60.51
N$1905  (via drill 0.76 pad 1.52)
  other vias: 39.64,60.51
N$1906  (via drill 0.76 pad 1.52)
  other vias: 47.26,60.51
N$1907  (via drill 0.76 pad 1.52)
  other vias: 44.72,60.51
N$1908  (via drill 0.76 pad 1.52)
  other vias: 52.34,60.51
N$1909  (via drill 0.76 pad 1.52)
  other vias: 49.8,60.51
N$1910  (via drill 0.76 pad 1.52)
  other vias: 54.88,60.51
N$1911  (via drill 0.76 pad 1.52)
  other vias: 24.4,60.51
N$1912  (via drill 0.76 pad 1.52)
  other vias: 26.94,60.51
N$1913  (via drill 0.76 pad 1.52)
  other vias: 29.48,60.51
N$1914  (via drill 0.76 pad 1.52)
  other vias: 9.16,60.51
N$1915  (via drill 0.76 pad 1.52)
  other vias: 11.7,60.51
N$1916  (via drill 0.76 pad 1.52)
  other vias: 14.24,60.51
N$1917  (via drill 0.76 pad 1.52)
  other vias: 16.78,60.51
N$1918  (via drill 0.76 pad 1.52)
  other vias: 19.32,60.51
N$1919  (via drill 0.76 pad 1.52)
  other vias: 37.1,63.05
N$1920  (via drill 0.76 pad 1.52)
  other vias: 34.56,63.05
N$1921  (via drill 0.76 pad 1.52)
  other vias: 42.18,63.05
N$1922  (via drill 0.76 pad 1.52)
  other vias: 39.64,63.05
N$1923  (via drill 0.76 pad 1.52)
  other vias: 47.26,63.05
N$1924  (via drill 0.76 pad 1.52)
  other vias: 44.72,63.05
N$1925  (via drill 0.76 pad 1.52)
  other vias: 52.34,63.05
N$1926  (via drill 0.76 pad 1.52)
  other vias: 49.8,63.05
N$1927  (via drill 0.76 pad 1.52)
  other vias: 54.88,63.05
N$1928  (via drill 0.76 pad 1.52)
  other vias: 24.4,63.05
N$1929  (via drill 0.76 pad 1.52)
  other vias: 26.94,63.05
N$1930  (via drill 0.76 pad 1.52)
  other vias: 29.48,63.05
N$1931  (via drill 0.76 pad 1.52)
  other vias: 9.16,63.05
N$1932  (via drill 0.76 pad 1.52)
  other vias: 11.7,63.05
N$1933  (via drill 0.76 pad 1.52)
  other vias: 14.24,63.05
N$1934  (via drill 0.76 pad 1.52)
  other vias: 16.78,63.05
N$1935  (via drill 0.76 pad 1.52)
  other vias: 19.32,63.05
N$1936  (via drill 0.76 pad 1.52)
  other vias: 37.1,65.59
N$1937  (via drill 0.76 pad 1.52)
  other vias: 34.56,65.59
N$1938  (via drill 0.76 pad 1.52)
  other vias: 42.18,65.59
N$1939  (via drill 0.76 pad 1.52)
  other vias: 39.64,65.59
N$1940  (via drill 0.76 pad 1.52)
  other vias: 47.26,65.59
N$1941  (via drill 0.76 pad 1.52)
  other vias: 44.72,65.59
N$1942  (via drill 0.76 pad 1.52)
  other vias: 52.34,65.59
N$1943  (via drill 0.76 pad 1.52)
  other vias: 49.8,65.59
N$1944  (via drill 0.76 pad 1.52)
  other vias: 54.88,65.59
N$1945  (via drill 0.76 pad 1.52)
  other vias: 24.4,65.59
N$1946  (via drill 0.76 pad 1.52)
  other vias: 26.94,65.59
N$1947  (via drill 0.76 pad 1.52)
  other vias: 29.48,65.59
N$1948  (via drill 0.76 pad 1.52)
  other vias: 9.16,65.59
N$1949  (via drill 0.76 pad 1.52)
  other vias: 11.7,65.59
N$1950  (via drill 0.76 pad 1.52)
  other vias: 14.24,65.59
N$1951  (via drill 0.76 pad 1.52)
  other vias: 16.78,65.59
N$1952  (via drill 0.76 pad 1.52)
  other vias: 19.32,65.59
N$1953  (via drill 0.76 pad 1.52)
  other vias: 37.1,68.13
N$1954  (via drill 0.76 pad 1.52)
  other vias: 34.56,68.13
N$1955  (via drill 0.76 pad 1.52)
  other vias: 42.18,68.13
N$1956  (via drill 0.76 pad 1.52)
  other vias: 39.64,68.13
N$1957  (via drill 0.76 pad 1.52)
  other vias: 47.26,68.13
N$1958  (via drill 0.76 pad 1.52)
  other vias: 44.72,68.13
N$1959  (via drill 0.76 pad 1.52)
  other vias: 52.34,68.13
N$1960  (via drill 0.76 pad 1.52)
  other vias: 49.8,68.13
N$1961  (via drill 0.76 pad 1.52)
  other vias: 54.88,68.13
N$1962  (via drill 0.76 pad 1.52)
  other vias: 24.4,68.13
N$1963  (via drill 0.76 pad 1.52)
  other vias: 26.94,68.13
N$1964  (via drill 0.76 pad 1.52)
  other vias: 29.48,68.13
N$1965  (via drill 0.76 pad 1.52)
  other vias: 9.16,68.13
N$1966  (via drill 0.76 pad 1.52)
  other vias: 11.7,68.13
N$1967  (via drill 0.76 pad 1.52)
  other vias: 14.24,68.13
N$1968  (via drill 0.76 pad 1.52)
  other vias: 16.78,68.13
N$1969  (via drill 0.76 pad 1.52)
  other vias: 19.32,68.13
N$1970  (via drill 0.76 pad 1.52)
  other vias: 37.1,70.67
N$1971  (via drill 0.76 pad 1.52)
  other vias: 34.56,70.67
N$1972  (via drill 0.76 pad 1.52)
  other vias: 42.18,70.67
N$1973  (via drill 0.76 pad 1.52)
  other vias: 39.64,70.67
N$1974  (via drill 0.76 pad 1.52)
  other vias: 47.26,70.67
N$1975  (via drill 0.76 pad 1.52)
  other vias: 44.72,70.67
N$1976  (via drill 0.76 pad 1.52)
  other vias: 52.34,70.67
N$1977  (via drill 0.76 pad 1.52)
  other vias: 49.8,70.67
N$1978  (via drill 0.76 pad 1.52)
  other vias: 54.88,70.67
N$1979  (via drill 0.76 pad 1.52)
  other vias: 24.4,70.67
N$1980  (via drill 0.76 pad 1.52)
  other vias: 26.94,70.67
N$1981  (via drill 0.76 pad 1.52)
  other vias: 29.48,70.67
N$1982  (via drill 0.76 pad 1.52)
  other vias: 9.16,70.67
N$1983  (via drill 0.76 pad 1.52)
  other vias: 11.7,70.67
N$1984  (via drill 0.76 pad 1.52)
  other vias: 14.24,70.67
N$1985  (via drill 0.76 pad 1.52)
  other vias: 16.78,70.67
N$1986  (via drill 0.76 pad 1.52)
  other vias: 19.32,70.67
N$1987  (via drill 0.76 pad 1.52)
  other vias: 37.1,73.21
N$1988  (via drill 0.76 pad 1.52)
  other vias: 34.56,73.21
N$1989  (via drill 0.76 pad 1.52)
  other vias: 42.18,73.21
N$1990  (via drill 0.76 pad 1.52)
  other vias: 39.64,73.21
N$1991  (via drill 0.76 pad 1.52)
  other vias: 47.26,73.21
N$1992  (via drill 0.76 pad 1.52)
  other vias: 44.72,73.21
N$1993  (via drill 0.76 pad 1.52)
  other vias: 52.34,73.21
N$1994  (via drill 0.76 pad 1.52)
  other vias: 49.8,73.21
N$1995  (via drill 0.76 pad 1.52)
  other vias: 54.88,73.21
N$1996  (via drill 0.76 pad 1.52)
  other vias: 24.4,73.21
N$1997  (via drill 0.76 pad 1.52)
  other vias: 26.94,73.21
N$1998  (via drill 0.76 pad 1.52)
  other vias: 29.48,73.21
N$1999  (via drill 0.76 pad 1.52)
  other vias: 9.16,73.21
N$2000  (via drill 0.76 pad 1.52)
  other vias: 11.7,73.21
N$2001  (via drill 0.76 pad 1.52)
  other vias: 14.24,73.21
N$2002  (via drill 0.76 pad 1.52)
  other vias: 16.78,73.21
N$2003  (via drill 0.76 pad 1.52)
  other vias: 19.32,73.21
N$2004  (via drill 0.76 pad 1.52)
  other vias: 37.1,75.75
N$2005  (via drill 0.76 pad 1.52)
  other vias: 34.56,75.75
N$2006  (via drill 0.76 pad 1.52)
  other vias: 42.18,75.75
N$2007  (via drill 0.76 pad 1.52)
  other vias: 39.64,75.75
N$2008  (via drill 0.76 pad 1.52)
  other vias: 47.26,75.75
N$2009  (via drill 0.76 pad 1.52)
  other vias: 44.72,75.75
N$2010  (via drill 0.76 pad 1.52)
  other vias: 52.34,75.75
N$2011  (via drill 0.76 pad 1.52)
  other vias: 49.8,75.75
N$2012  (via drill 0.76 pad 1.52)
  other vias: 54.88,75.75
N$2013  (via drill 0.76 pad 1.52)
  other vias: 24.4,75.75
N$2014  (via drill 0.76 pad 1.52)
  other vias: 26.94,75.75
N$2015  (via drill 0.76 pad 1.52)
  other vias: 29.48,75.75
N$2016  (via drill 0.76 pad 1.52)
  other vias: 9.16,75.75
N$2017  (via drill 0.76 pad 1.52)
  other vias: 11.7,75.75
N$2018  (via drill 0.76 pad 1.52)
  other vias: 14.24,75.75
N$2019  (via drill 0.76 pad 1.52)
  other vias: 16.78,75.75
N$2020  (via drill 0.76 pad 1.52)
  other vias: 19.32,75.75
N$2021  (via drill 0.76 pad 1.52)
  other vias: 37.1,78.29
N$2022  (via drill 0.76 pad 1.52)
  other vias: 34.56,78.29
N$2023  (via drill 0.76 pad 1.52)
  other vias: 42.18,78.29
N$2024  (via drill 0.76 pad 1.52)
  other vias: 39.64,78.29
N$2025  (via drill 0.76 pad 1.52)
  other vias: 47.26,78.29
N$2026  (via drill 0.76 pad 1.52)
  other vias: 44.72,78.29
N$2027  (via drill 0.76 pad 1.52)
  other vias: 52.34,78.29
N$2028  (via drill 0.76 pad 1.52)
  other vias: 49.8,78.29
N$2029  (via drill 0.76 pad 1.52)
  other vias: 54.88,78.29
N$2030  (via drill 0.76 pad 1.52)
  other vias: 24.4,78.29
N$2031  (via drill 0.76 pad 1.52)
  other vias: 26.94,78.29
N$2032  (via drill 0.76 pad 1.52)
  other vias: 29.48,78.29
N$2033  (via drill 0.76 pad 1.52)
  other vias: 9.16,78.29
N$2034  (via drill 0.76 pad 1.52)
  other vias: 11.7,78.29
N$2035  (via drill 0.76 pad 1.52)
  other vias: 14.24,78.29
N$2036  (via drill 0.76 pad 1.52)
  other vias: 16.78,78.29
N$2037  (via drill 0.76 pad 1.52)
  other vias: 19.32,78.29
N$2038  (via drill 0.76 pad 1.52)
  other vias: 37.1,80.83
N$2039  (via drill 0.76 pad 1.52)
  other vias: 34.56,80.83
N$2040  (via drill 0.76 pad 1.52)
  other vias: 42.18,80.83
N$2041  (via drill 0.76 pad 1.52)
  other vias: 39.64,80.83
N$2042  (via drill 0.76 pad 1.52)
  other vias: 47.26,80.83
N$2043  (via drill 0.76 pad 1.52)
  other vias: 44.72,80.83
N$2044  (via drill 0.76 pad 1.52)
  other vias: 52.34,80.83
N$2045  (via drill 0.76 pad 1.52)
  other vias: 49.8,80.83
N$2046  (via drill 0.76 pad 1.52)
  other vias: 54.88,80.83
N$2047  (via drill 0.76 pad 1.52)
  other vias: 24.4,80.83
N$2048  (via drill 0.76 pad 1.52)
  other vias: 26.94,80.83
N$2049  (via drill 0.76 pad 1.52)
  other vias: 29.48,80.83
N$2050  (via drill 0.76 pad 1.52)
  other vias: 9.16,80.83
N$2051  (via drill 0.76 pad 1.52)
  other vias: 11.7,80.83
N$2052  (via drill 0.76 pad 1.52)
  other vias: 14.24,80.83
N$2053  (via drill 0.76 pad 1.52)
  other vias: 16.78,80.83
N$2054  (via drill 0.76 pad 1.52)
  other vias: 19.32,80.83
N$2055  (via drill 0.76 pad 1.52)
  other vias: 37.1,83.37
N$2056  (via drill 0.76 pad 1.52)
  other vias: 34.56,83.37
N$2057  (via drill 0.76 pad 1.52)
  other vias: 42.18,83.37
N$2058  (via drill 0.76 pad 1.52)
  other vias: 39.64,83.37
N$2059  (via drill 0.76 pad 1.52)
  other vias: 47.26,83.37
N$2060  (via drill 0.76 pad 1.52)
  other vias: 44.72,83.37
N$2061  (via drill 0.76 pad 1.52)
  other vias: 52.34,83.37
N$2062  (via drill 0.76 pad 1.52)
  other vias: 49.8,83.37
N$2063  (via drill 0.76 pad 1.52)
  other vias: 54.88,83.37
N$2064  (via drill 0.76 pad 1.52)
  other vias: 24.4,83.37
N$2065  (via drill 0.76 pad 1.52)
  other vias: 26.94,83.37
N$2066  (via drill 0.76 pad 1.52)
  other vias: 29.48,83.37
N$2067  (via drill 0.76 pad 1.52)
  other vias: 9.16,83.37
N$2068  (via drill 0.76 pad 1.52)
  other vias: 11.7,83.37
N$2069  (via drill 0.76 pad 1.52)
  other vias: 14.24,83.37
N$2070  (via drill 0.76 pad 1.52)
  other vias: 16.78,83.37
N$2071  (via drill 0.76 pad 1.52)
  other vias: 19.32,83.37
N$2072  (via drill 0.76 pad 1.52)
  other vias: 37.1,85.91
N$2073  (via drill 0.76 pad 1.52)
  other vias: 34.56,85.91
N$2074  (via drill 0.76 pad 1.52)
  other vias: 42.18,85.91
N$2075  (via drill 0.76 pad 1.52)
  other vias: 39.64,85.91
N$2076  (via drill 0.76 pad 1.52)
  other vias: 47.26,85.91
N$2077  (via drill 0.76 pad 1.52)
  other vias: 44.72,85.91
N$2078  (via drill 0.76 pad 1.52)
  other vias: 52.34,85.91
N$2079  (via drill 0.76 pad 1.52)
  other vias: 49.8,85.91
N$2080  (via drill 0.76 pad 1.52)
  other vias: 54.88,85.91
N$2081  (via drill 0.76 pad 1.52)
  other vias: 24.4,85.91
N$2082  (via drill 0.76 pad 1.52)
  other vias: 26.94,85.91
N$2083  (via drill 0.76 pad 1.52)
  other vias: 29.48,85.91
N$2084  (via drill 0.76 pad 1.52)
  other vias: 9.16,85.91
N$2085  (via drill 0.76 pad 1.52)
  other vias: 11.7,85.91
N$2086  (via drill 0.76 pad 1.52)
  other vias: 14.24,85.91
N$2087  (via drill 0.76 pad 1.52)
  other vias: 16.78,85.91
N$2088  (via drill 0.76 pad 1.52)
  other vias: 19.32,85.91
N$2089  (via drill 0.76 pad 1.52)
  other vias: 37.1,88.45
N$2090  (via drill 0.76 pad 1.52)
  other vias: 34.56,88.45
N$2091  (via drill 0.76 pad 1.52)
  other vias: 42.18,88.45
N$2092  (via drill 0.76 pad 1.52)
  other vias: 39.64,88.45
N$2093  (via drill 0.76 pad 1.52)
  other vias: 47.26,88.45
N$2094  (via drill 0.76 pad 1.52)
  other vias: 44.72,88.45
N$2095  (via drill 0.76 pad 1.52)
  other vias: 52.34,88.45
N$2096  (via drill 0.76 pad 1.52)
  other vias: 49.8,88.45
N$2097  (via drill 0.76 pad 1.52)
  other vias: 54.88,88.45
N$2098  (via drill 0.76 pad 1.52)
  other vias: 24.4,88.45
N$2099  (via drill 0.76 pad 1.52)
  other vias: 26.94,88.45
N$2100  (via drill 0.76 pad 1.52)
  other vias: 29.48,88.45
N$2101  (via drill 0.76 pad 1.52)
  other vias: 9.16,88.45
N$2102  (via drill 0.76 pad 1.52)
  other vias: 11.7,88.45
N$2103  (via drill 0.76 pad 1.52)
  other vias: 14.24,88.45
N$2104  (via drill 0.76 pad 1.52)
  other vias: 16.78,88.45
N$2105  (via drill 0.76 pad 1.52)
  other vias: 19.32,88.45
N$2106  (via drill 0.76 pad 1.52)
  other vias: 37.1,90.99
N$2107  (via drill 0.76 pad 1.52)
  other vias: 34.56,90.99
N$2108  (via drill 0.76 pad 1.52)
  other vias: 42.18,90.99
N$2109  (via drill 0.76 pad 1.52)
  other vias: 39.64,90.99
N$2110  (via drill 0.76 pad 1.52)
  other vias: 47.26,90.99
N$2111  (via drill 0.76 pad 1.52)
  other vias: 44.72,90.99
N$2112  (via drill 0.76 pad 1.52)
  other vias: 52.34,90.99
N$2113  (via drill 0.76 pad 1.52)
  other vias: 49.8,90.99
N$2114  (via drill 0.76 pad 1.52)
  other vias: 54.88,90.99
N$2115  (via drill 0.76 pad 1.52)
  other vias: 24.4,90.99
N$2116  (via drill 0.76 pad 1.52)
  other vias: 26.94,90.99
N$2117  (via drill 0.76 pad 1.52)
  other vias: 29.48,90.99
N$2118  (via drill 0.76 pad 1.52)
  other vias: 9.16,90.99
N$2119  (via drill 0.76 pad 1.52)
  other vias: 11.7,90.99
N$2120  (via drill 0.76 pad 1.52)
  other vias: 14.24,90.99
N$2121  (via drill 0.76 pad 1.52)
  other vias: 16.78,90.99
N$2122  (via drill 0.76 pad 1.52)
  other vias: 19.32,90.99
N$2123  (via drill 0.76 pad 1.52)
  other vias: 37.1,93.53
N$2124  (via drill 0.76 pad 1.52)
  other vias: 34.56,93.53
N$2125  (via drill 0.76 pad 1.52)
  other vias: 42.18,93.53
N$2126  (via drill 0.76 pad 1.52)
  other vias: 39.64,93.53
N$2127  (via drill 0.76 pad 1.52)
  other vias: 47.26,93.53
N$2128  (via drill 0.76 pad 1.52)
  other vias: 44.72,93.53
N$2129  (via drill 0.76 pad 1.52)
  other vias: 52.34,93.53
N$2130  (via drill 0.76 pad 1.52)
  other vias: 49.8,93.53
N$2131  (via drill 0.76 pad 1.52)
  other vias: 54.88,93.53
N$2132  (via drill 0.76 pad 1.52)
  other vias: 24.4,93.53
N$2133  (via drill 0.76 pad 1.52)
  other vias: 26.94,93.53
N$2134  (via drill 0.76 pad 1.52)
  other vias: 29.48,93.53
N$2135  (via drill 0.76 pad 1.52)
  other vias: 9.16,93.53
N$2136  (via drill 0.76 pad 1.52)
  other vias: 11.7,93.53
N$2137  (via drill 0.76 pad 1.52)
  other vias: 14.24,93.53
N$2138  (via drill 0.76 pad 1.52)
  other vias: 16.78,93.53
N$2139  (via drill 0.76 pad 1.52)
  other vias: 19.32,93.53
N$2140  (via drill 0.76 pad 1.52)
  other vias: 37.1,96.07
N$2141  (via drill 0.76 pad 1.52)
  other vias: 34.56,96.07
N$2142  (via drill 0.76 pad 1.52)
  other vias: 42.18,96.07
N$2143  (via drill 0.76 pad 1.52)
  other vias: 39.64,96.07
N$2144  (via drill 0.76 pad 1.52)
  other vias: 47.26,96.07
N$2145  (via drill 0.76 pad 1.52)
  other vias: 44.72,96.07
N$2146  (via drill 0.76 pad 1.52)
  other vias: 52.34,96.07
N$2147  (via drill 0.76 pad 1.52)
  other vias: 49.8,96.07
N$2148  (via drill 0.76 pad 1.52)
  other vias: 54.88,96.07
N$2149  (via drill 0.76 pad 1.52)
  other vias: 24.4,96.07
N$2150  (via drill 0.76 pad 1.52)
  other vias: 26.94,96.07
N$2151  (via drill 0.76 pad 1.52)
  other vias: 29.48,96.07
N$2152  (via drill 0.76 pad 1.52)
  other vias: 9.16,96.07
N$2153  (via drill 0.76 pad 1.52)
  other vias: 11.7,96.07
N$2154  (via drill 0.76 pad 1.52)
  other vias: 14.24,96.07
N$2155  (via drill 0.76 pad 1.52)
  other vias: 16.78,96.07
N$2156  (via drill 0.76 pad 1.52)
  other vias: 19.32,96.07
N$2157  (via drill 0.76 pad 1.52)
  other vias: 37.1,98.61
N$2158  (via drill 0.76 pad 1.52)
  other vias: 34.56,98.61
N$2159  (via drill 0.76 pad 1.52)
  other vias: 42.18,98.61
N$2160  (via drill 0.76 pad 1.52)
  other vias: 39.64,98.61
N$2161  (via drill 0.76 pad 1.52)
  other vias: 47.26,98.61
N$2162  (via drill 0.76 pad 1.52)
  other vias: 44.72,98.61
N$2163  (via drill 0.76 pad 1.52)
  other vias: 52.34,98.61
N$2164  (via drill 0.76 pad 1.52)
  other vias: 49.8,98.61
N$2165  (via drill 0.76 pad 1.52)